# EAGLE board mag_encoder_Rev3_single_sided (EAGLE 7.5.0)
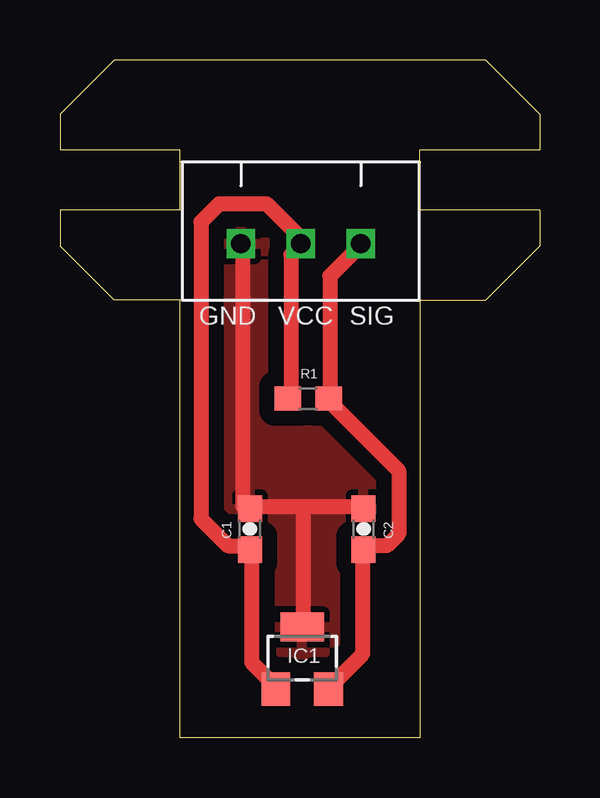
[diagram p0: board, top side]

Size 20 x 28.25 mm. Coordinates in mm from the lower left corner, seen from the top.
Outline: 5,0 5,18.25 2.25,18.25 0,20.5 0,22 5,22 5,24.5 0,24.5 0,26 2.25,28.25 17.75,28.25 20,26 20,24.5 15,24.5 15,22 20,22 20,20.5 17.75,18.25 15,18.25 15,0 5,0
Copper layers 1: Top 0.0356mm
Design rules "LawlorPCB": minimum track width 25mil, minimum drill 13mil, track to track 25mil, track to pad 25mil, pad to pad 10mil, via to via 10mil, smd to smd 10mil, copper to edge 15mil, drill to drill 15mil, minimum pad ring 7mil, minimum via ring 7mil, stop-mask expansion 3mil, vias tented up to drill 0mil, thermal gap 10mil

## Footprints (pad centres in the part's own frame; a part is rotated, then mirrored left to right if it is on the bottom)
0603-CAP = smd 1.1 x 1: 1 -0.85,0; 2 0.85,0
SOT23-W = smd 1.2 x 1.4: 1 -1.1,-1.3; 2 1.1,-1.3 | smd 1.8 x 1.2: 3 0,1.3
0603 = smd 1.1 x 1: 1 -0.85,0; 2 0.85,0
3_PIN_JST-XH = drill 0.8 square: P$1 2.45,3.4; P$2 4.95,3.4; P$3 7.45,3.4

## Placement (x,y rotation side)
C1  100nF  [0603-CAP]  7.92,8.69 90 top
C2  4.7nF  [0603-CAP]  12.66,8.69 90 top
IC1  A1203LH  [SOT23-W]  10.1,3.32 0 top
R1  10k  [0603]  10.35,14.13 180 top
U$1  3_PIN_JST-XH  [3_PIN_JST-XH]  14.99,24 180 top

## Library data of the parts
C1 = SparkFun-Capacitors
C2 = SparkFun-Capacitors; PROD_ID: CAP-11378
IC1 = allegro; MF: ALLEGRO MICROSYSTEMS, INC.; MPN: A1203LLHLT-T; OC_FARNELL: 1791384; OC_NEWARK: 31K6608
R1 = SparkFun-Resistors; PROD_ID: RES-09570
U$1 = Clayton

## Nets
GND: C1.2 C2.2 IC1.3 U$1.P$3
SIG: C2.1 IC1.2 R1.1 U$1.P$1
VCC: C1.1 IC1.1 R1.2 U$1.P$2

## Tracks (layer width: path | path; a pad name or v marks a point on that pad's centre or on a via)
GND
  Top 0.635: 10.12,9.62 12.62,9.62 C2.2 | 10.12,9.62 8,9.62 C1.2 7.62,9.62 7.62,20.5 U$1.P$3 | 10.12,9.62 10.12,4.62 IC1.3
  pour Top: -0.75,29.38 20.38,29.38 20.38,-1.25 -0.38,-1.25
SIG
  Top 0.635: IC1.2 11.25,2.12 12.62,3.5 12.62,7.75 C2.1 12.88,8 13.62,8 14.12,8.5 14.12,11.12 11.38,13.88 R1.1 11.25,14.25 11.25,19.25 12.5,20.5 U$1.P$1
VCC
  Top 0.635: IC1.1 9,2.12 8,3.12 8,7.75 C1.1 7.62,8 7,8 5.88,9.12 5.88,21.5 6.62,22.25 8.62,22.25 10,20.88 U$1.P$2 10,20.5 9.62,20.12 9.62,14.25 R1.2

## Text on the board
tNames: GND | VCC | SIG
bNames: Magnetic Encoder Rev3